# EAGLE board EBook READER v4 - Board (EAGLE 9.7.0)

Size 170.7 x 111.64 mm. Coordinates in mm from the lower left corner, seen from the top.
Outline: 0.48,111.53 0,0 170.43,0 170.7,111.64 0.48,111.53
Copper layers (1*16): Top / Bottom
Stack-up Default Layer Stack: Top User Defined 0.035mm / Dielectric-1 User Defined 1.5mm / Bottom User Defined 0.035mm
Design rules: minimum copper width 6mil, minimum drill size 0.35mm, copper clearance wire_polygon to wire_polygon 6mil, copper clearance wire_polygon to pad_smd 6mil, copper clearance wire_polygon to via 6mil, copper clearance pad_smd to pad_smd 6mil, copper clearance pad_smd to via 6mil, copper clearance via to via 6mil, copper clearance smd to pad (same net) 6mil, copper clearance smd to via (same net) 6mil, copper clearance smd to smd (same net) 6mil, dimension clearance 40mil, via restrict clearance 0mil, restrict clearance 0mil, drill distance 6mil, keepout clearance 0mil

## Footprints (pad centres in the part's own frame; a part is rotated, then mirrored left to right if it is on the bottom)
ESP32_WROVER_EAGLE-LTSPICE_C0402 = smd 0.7 x 0.9: 1 -0.65,0; 2 0.65,0
EAGLE-LTSPICE_C0402 = smd 0.7 x 0.9: 1 -0.65,0; 2 0.65,0
CAPCP3225X100N = smd 1.4 x 1.4: 1 -1.1,0; 2 1.1,0
RCL_CT3528 = smd 2 x 2.2: + -1.5,0; - 1.5,0
ADAFRUIT_CHIP-LED0603 = smd 0.8 x 0.8: A 0,-0.75; C 0,0.75
SOD3716X135N = smd 1.15 x 0.8: 1 -1.75,0; 2 1.75,0
DIOC1608X36N = smd 0.97 x 0.94: 1 -0.75,0; 2 0.75,0
ESP32_WROVER_AVX---SD0805S020S1R0_AVX_SD0805S020S1R0_0 = smd 0.8 x 0.9: 1 -1.05,0; 2 1.05,0
SOT95P280X145-6N = smd 1.2 x 0.6: 1 -1.25,0.95; 2 -1.25,0; 3 -1.25,-0.95; 4 1.25,-0.95; 5 1.25,0; 6 1.25,0.95
SOT95P280X120-5N = smd 0.9 x 0.6: 1 -1.4,0.95; 2 -1.4,0; 3 -1.4,-0.95; 4 1.4,-0.95; 5 1.4,0.95
SOT95P280X125-5N = smd 0.9 x 0.6: 1 -1.4,0.95; 2 -1.4,0; 3 -1.4,-0.95; 4 1.4,-0.95; 5 1.4,0.95
112ATAARR03ATTEND = smd 1.8 x 1.2: G1 10.6,10.4; G2 4.9,10.4; S1 7.75,10.4; S2 2.05,10.4 | smd 1.4 x 1.9: G3 13.6,-3.85; G4 0.45,-2.85 | smd 0.7 x 1.5: P1 8.8,0; P2 7.7,0.4; P3 6.6,0; P4 5.5,-0.2; P5 4.4,0; P6 3.3,-0.2; P7 2.2,0; P8 1.1,0
JST04_1MM_RA = smd 0.6 x 1.35: 1 -1.5,0; 2 -0.5,0; 3 0.5,0; 4 1.5,0 | smd 1.2 x 2: NC1 2.8,-3.675; NC2 -2.8,-3.675
FH34SRJ24S05SH99 = smd 0.3 x 0.8: 1 5.75,1.45; 2 5.25,1.45; 3 4.75,1.45; 4 4.25,1.45; 5 3.75,1.45; 6 3.25,1.45; 7 2.75,1.45; 8 2.25,1.45; 9 1.75,1.45; 10 1.25,1.45; 11 0.75,1.45; 12 0.25,1.45; 13 -0.25,1.45; 14 -0.75,1.45; 15 -1.25,1.45; 16 -1.75,1.45; 17 -2.25,1.45; 18 -2.75,1.45; 19 -3.25,1.45; 20 -3.75,1.45; 21 -4.25,1.45; 22 -4.75,1.45; 23 -5.25,1.45; 24 -5.75,1.45 | smd 0.4 x 0.8: MP1 6.75,-1.05; MP2 -6.75,-1.05
SAMACSYS_PARTS_USB4110GFA = smd 0.3 x 1.15: A1 -3.35,3.678; A4 -2.55,3.678; A5 -1.25,3.678; A6 -0.25,3.678; A7 0.25,3.678; A8 1.25,3.678; A9 2.55,3.678; A12 3.35,3.678; B1 3.05,3.678; B4 2.25,3.678; B5 1.75,3.678; B6 0.75,3.678; B7 -0.75,3.678; B8 -1.75,3.678; B9 -2.25,3.678; B12 -3.05,3.678 | smd 2.18 x 2: MP1 -5.11,-0.827; MP2 5.11,-0.827; MP3 -5.11,3.103; MP4 5.11,3.103 | hole 0.65: -2.89,2.603; 2.89,2.603
IND_4828-WE-TPC_WRE = smd 0.127 x 0.127: 1 -2.286,0; 2 2.286,0
ESP32_WROVER_SPARKFUN-IC-POWER_SOT23-5 = smd 0.55 x 1.2: 1 -0.95,-1.3; 2 0,-1.3; 3 0.95,-1.3; 4 0.95,1.3; 5 -0.95,1.3
ESP32_WROVER_SPARKFUN-DISCRETESEMI_SOT23-3 = smd 0.8 x 0.9: 1 -0.95,-1; 2 0.95,-1; 3 0,1.1
SOT65P210X110-3N = smd 1.05 x 0.5: 1 -1.05,0.65; 2 -1.05,-0.65; 3 1.05,0
ESP32_WROVER_EAGLE-LTSPICE_R0402 = smd 0.7 x 0.9: 1 -0.65,0; 2 0.65,0
RESC1005X40 = smd 0.535 x 0.644: 1 -0.507,0; 2 0.507,0
ESP32C6_VARISTOR_CT/CN1812 = smd 1.5 x 3.6: 1 -2.25,0; 2 2.25,0
SJ = smd 1.168 x 1.6: 1 -0.762,0; 2 0.762,0
TP20R = smd 2 x 2: TP 0,0
SON50P200X200X80-9N = smd 0.76 x 0.27: 1 -0.985,0.75; 2 -0.985,0.25; 3 -0.985,-0.25; 4 -0.985,-0.75; 5 0.985,-0.75; 6 0.985,-0.25; 7 0.985,0.25; 8 0.985,0.75 | smd 0.9 x 1.3: 9 0,0
SON127P600X800X80-9N = smd 0.94 x 0.44: 1 -3.895,1.905; 2 -3.895,0.635; 3 -3.895,-0.635; 4 -3.895,-1.905; 5 3.895,-1.905; 6 3.895,-0.635; 7 3.895,0.635; 8 3.895,1.905 | smd 3.4 x 4.3: 9 0,0
XCVR_ESP32-C6-WROOM-1-N8 = smd 1.5 x 0.9: 1 -8.75,5.26; 2 -8.75,3.99; 3 -8.75,2.72; 4 -8.75,1.45; 5 -8.75,0.18; 6 -8.75,-1.09; 7 -8.75,-2.36; 8 -8.75,-3.63; 9 -8.75,-4.9; 10 -8.75,-6.17; 11 -8.75,-7.44; 12 -8.75,-8.71; 13 -8.75,-9.98; 14 -8.75,-11.25; 15 8.75,-11.25; 16 8.75,-9.98; 17 8.75,-8.71; 18 8.75,-7.44; 19 8.75,-6.17; 20 8.75,-4.9; 21 8.75,-3.63; 22 8.75,-2.36; 23 8.75,-1.09; 24 8.75,0.18; 25 8.75,1.45; 26 8.75,2.72; 27 8.75,3.99; 28 8.75,5.26 | smd 0.8 x 0.8: 29_1 -2.755,0.79; 29_2 -1.505,0.79; 29_3 -0.255,0.79; 29_4 -2.755,-0.46; 29_5 -1.505,-0.46; 29_6 -0.255,-0.46; 29_7 -2.755,-1.71; 29_8 -1.505,-1.71; 29_9 -0.255,-1.71
ESP32_WROVER_BME680_PSON80P300X300X100-8N = smd 1.016 x 0.5: 1 1.458,1.2; 2 1.458,0.4; 3 1.458,-0.4; 4 1.458,-1.2; 5 -1.458,-1.22; 6 -1.458,-0.4; 7 -1.458,0.4; 8 -1.458,1.2
SOIC127P1032X265-16N = smd 2.05 x 0.59: 1 -4.655,4.445; 2 -4.655,3.175; 3 -4.655,1.905; 4 -4.655,0.635; 5 -4.655,-0.635; 6 -4.655,-1.905; 7 -4.655,-3.175; 8 -4.655,-4.445; 9 4.655,-4.445; 10 4.655,-3.175; 11 4.655,-1.905; 12 4.655,-0.635; 13 4.655,0.635; 14 4.655,1.905; 15 4.655,3.175; 16 4.655,4.445
MYBUTTON = smd 1.4 x 1.05: 1 1.75,0.75; 2 -1.75,0.75; 3 -1.75,-0.75; 4 1.75,-0.75

## Placement (x,y rotation side)
C1  [ESP32_WROVER_EAGLE-LTSPICE_C0402]  -60.69,96.52 0 top  (outside the outline)
C1_BAT  4.7uF  [ESP32_WROVER_EAGLE-LTSPICE_C0402]  -88.63,71.12 0 top  (outside the outline)
C1_BAT1  4.7uF  [ESP32_WROVER_EAGLE-LTSPICE_C0402]  -67.04,66.04 0 top  (outside the outline)
C1_BAT2  4.7uF  [ESP32_WROVER_EAGLE-LTSPICE_C0402]  -77.2,66.04 0 top  (outside the outline)
C2  [ESP32_WROVER_EAGLE-LTSPICE_C0402]  -64.5,96.52 0 top  (outside the outline)
C2_BAT  4.7uF  [ESP32_WROVER_EAGLE-LTSPICE_C0402]  -97.52,71.12 0 top  (outside the outline)
C3  [EAGLE-LTSPICE_C0402]  -68.31,96.52 0 top  (outside the outline)
C4  4.7uF/25V  [EAGLE-LTSPICE_C0402]  -46.72,66.04 0 top  (outside the outline)
C5  CPH3225A  [CAPCP3225X100N]  -22.59,66.04 0 top  (outside the outline)
C6  1uF/50V  [ESP32_WROVER_EAGLE-LTSPICE_C0402]  -86.09,66.04 0 top  (outside the outline)
C7  10uF  [EAGLE-LTSPICE_C0402]  -93.71,76.2 0 top  (outside the outline)
C8  1uF/50V  [ESP32_WROVER_EAGLE-LTSPICE_C0402]  -94.98,66.04 0 top  (outside the outline)
C9  100nF  [EAGLE-LTSPICE_C0402]  -50.53,76.2 0 top  (outside the outline)
C10  0.1uF/50V  [ESP32_WROVER_EAGLE-LTSPICE_C0402]  -56.88,66.04 0 top  (outside the outline)
C11  1uF/50V  [ESP32_WROVER_EAGLE-LTSPICE_C0402]  -26.4,71.12 0 top  (outside the outline)
C12  1uF/50V  [ESP32_WROVER_EAGLE-LTSPICE_C0402]  -35.29,71.12 0 top  (outside the outline)
C13  1uF/50V  [ESP32_WROVER_EAGLE-LTSPICE_C0402]  -44.18,71.12 0 top  (outside the outline)
C14  1uF/50V  [ESP32_WROVER_EAGLE-LTSPICE_C0402]  -53.07,71.12 0 top  (outside the outline)
C15  1uF/50V  [ESP32_WROVER_EAGLE-LTSPICE_C0402]  -61.96,71.12 0 top  (outside the outline)
C16  1uF/50V  [ESP32_WROVER_EAGLE-LTSPICE_C0402]  -70.85,71.12 0 top  (outside the outline)
C17  1uF/50V  [ESP32_WROVER_EAGLE-LTSPICE_C0402]  -79.74,71.12 0 top  (outside the outline)
C18  100uF  [RCL_CT3528]  -47.99,50.8 0 top  (outside the outline)
C19  100nF  [ESP32_WROVER_EAGLE-LTSPICE_C0402]  -58.15,76.2 0 top  (outside the outline)
C20  4.7uF  [ESP32_WROVER_EAGLE-LTSPICE_C0402]  -87.36,76.2 0 top  (outside the outline)
C21  100nF  [ESP32_WROVER_EAGLE-LTSPICE_C0402]  -65.77,76.2 0 top  (outside the outline)
C22  1uF  [ESP32_WROVER_EAGLE-LTSPICE_C0402]  -22.59,81.28 0 top  (outside the outline)
C23  100nF  [ESP32_WROVER_EAGLE-LTSPICE_C0402]  -73.39,76.2 0 top  (outside the outline)
C24  100nF  [ESP32_WROVER_EAGLE-LTSPICE_C0402]  -81.01,76.2 0 top  (outside the outline)
CHG_LED  [ADAFRUIT_CHIP-LED0603]  -79.74,31.75 0 top  (outside the outline)
D1  MBR0530  [SOD3716X135N]  -86.09,96.52 0 top  (outside the outline)
D2  MBR0530  [SOD3716X135N]  -23.86,101.6 0 top  (outside the outline)
D3  MBR0530  [SOD3716X135N]  -34.02,101.6 0 top  (outside the outline)
D4  PGB1010603MR  [DIOC1608X36N]  -79.74,91.44 0 top  (outside the outline)
D5  PGB1010603MR  [DIOC1608X36N]  -87.36,91.44 0 top  (outside the outline)
D6  PGB1010603MR  [DIOC1608X36N]  -94.98,91.44 0 top  (outside the outline)
D7  PGB1010603MR  [DIOC1608X36N]  -25.13,96.52 0 top  (outside the outline)
D8  PGB1010603MR  [DIOC1608X36N]  -32.75,96.52 0 top  (outside the outline)
D9  PGB1010603MR  [DIOC1608X36N]  -40.37,96.52 0 top  (outside the outline)
D10  ESP32_WROVER_AVX---SD0805S020S1R0_AVX_SD0805S020S1R0_0_0AVX_SD0805S020S1R0_0_0  [ESP32_WROVER_AVX---SD0805S020S1R0_AVX_SD0805S020S1R0_0]  -61.96,100.33 0 top  (outside the outline)
D11  ESP32_WROVER_AVX---SD0805S020S1R0_AVX_SD0805S020S1R0_0_0AVX_SD0805S020S1R0_0_0  [ESP32_WROVER_AVX---SD0805S020S1R0_AVX_SD0805S020S1R0_0]  -68.31,100.33 0 top  (outside the outline)
D12  USBLC6-2SC6Y  [SOT95P280X145-6N]  -67.04,91.44 0 top  (outside the outline)
IC1  XC6220A331MR-G  [SOT95P280X120-5N]  -37.83,91.44 0 top  (outside the outline)
IC2  BD5229G-TR  [SOT95P280X125-5N]  -53.07,91.44 0 top  (outside the outline)
J1  112A-TAAR-R03_ATTEND  [112ATAARR03ATTEND]  -92.44,6.35 0 top  (outside the outline)
J2  QWIIC_RIGHT_ANGLE  [JST04_1MM_RA]  -70.85,60.96 0 top  (outside the outline)
J3  FH34SRJ-24S-0.5SH_99_  [FH34SRJ24S05SH99]  -86.09,58.42 0 top  (outside the outline)
J4  SAMACSYS_PARTS_USB4110-GF-A  [SAMACSYS_PARTS_USB4110GFA]  -47.99,35.56 0 top  (outside the outline)
L1  68uH  [IND_4828-WE-TPC_WRE]  -55.61,19.05 0 top  (outside the outline)
MCP73831  ESP32_WROVER_SPARKFUN-IC-POWER_MCP73831  [ESP32_WROVER_SPARKFUN-IC-POWER_SOT23-5]  -40.37,59.69 0 top  (outside the outline)
Q1  20V/4.2A/52mΩ/1.4W  [ESP32_WROVER_SPARKFUN-DISCRETESEMI_SOT23-3]  -84.82,35.56 0 top  (outside the outline)
Q2  SI1308EDL-T1-GE3  [SOT65P210X110-3N]  -47.99,101.6 0 top  (outside the outline)
Q3  20V/4.2A/52mΩ/1.4W  [ESP32_WROVER_SPARKFUN-DISCRETESEMI_SOT23-3]  -89.9,35.56 0 top  (outside the outline)
R1  [ESP32_WROVER_EAGLE-LTSPICE_R0402]  -72.12,96.52 0 top  (outside the outline)
R1_BAT  200  [ESP32_WROVER_EAGLE-LTSPICE_R0402]  -26.4,76.2 0 top  (outside the outline)
R1_PWRUSB  100K  [ESP32_WROVER_EAGLE-LTSPICE_R0402]  -36.56,66.04 0 top  (outside the outline)
R2  2.2  [RESC1005X40]  -61.96,58.42 0 top  (outside the outline)
R2_BAT  2K  [ESP32_WROVER_EAGLE-LTSPICE_R0402]  -35.29,76.2 0 top  (outside the outline)
R3  [ESP32_WROVER_EAGLE-LTSPICE_R0402]  -75.93,96.52 0 top  (outside the outline)
R4  [ESP32_WROVER_EAGLE-LTSPICE_R0402]  -79.74,96.52 0 top  (outside the outline)
R5  10K  [ESP32_WROVER_EAGLE-LTSPICE_R0402]  -63.23,81.28 0 top  (outside the outline)
R6  0.47  [ESP32_WROVER_EAGLE-LTSPICE_R0402]  -98.79,76.2 0 top  (outside the outline)
R7  10K  [ESP32_WROVER_EAGLE-LTSPICE_R0402]  -68.31,81.28 0 top  (outside the outline)
R8  10K  [ESP32_WROVER_EAGLE-LTSPICE_R0402]  -73.39,81.28 0 top  (outside the outline)
R9  10K  [ESP32_WROVER_EAGLE-LTSPICE_R0402]  -78.47,81.28 0 top  (outside the outline)
R10  10K  [ESP32_WROVER_EAGLE-LTSPICE_R0402]  -27.67,81.28 0 top  (outside the outline)
R11  10K  [ESP32_WROVER_EAGLE-LTSPICE_R0402]  -83.55,81.28 0 top  (outside the outline)
R12  10K  [ESP32_WROVER_EAGLE-LTSPICE_R0402]  -32.75,81.28 0 top  (outside the outline)
R13  [ESP32_WROVER_EAGLE-LTSPICE_R0402]  -46.72,96.52 0 top  (outside the outline)
R14  [ESP32_WROVER_EAGLE-LTSPICE_R0402]  -51.8,96.52 0 top  (outside the outline)
R15  [ESP32_WROVER_EAGLE-LTSPICE_R0402]  -56.88,96.52 0 top  (outside the outline)
R16  5k1  [ESP32_WROVER_EAGLE-LTSPICE_R0402]  -37.83,81.28 0 top  (outside the outline)
R17  5k1  [ESP32_WROVER_EAGLE-LTSPICE_R0402]  -42.91,81.28 0 top  (outside the outline)
R18  ESP32C6_VARISTORCN1812  [ESP32C6_VARISTOR_CT/CN1812]  -41.64,50.8 0 top  (outside the outline)
R19  10K  [ESP32_WROVER_EAGLE-LTSPICE_R0402]  -47.99,81.28 0 top  (outside the outline)
R20  10K  [ESP32_WROVER_EAGLE-LTSPICE_R0402]  -53.07,81.28 0 top  (outside the outline)
R21  10K  [ESP32_WROVER_EAGLE-LTSPICE_R0402]  -58.15,81.28 0 top  (outside the outline)
R_CL1  10K  [ESP32_WROVER_EAGLE-LTSPICE_R0402]  -42.91,76.2 0 top  (outside the outline)
SJ1  [SJ]  -26.4,91.44 0 top  (outside the outline)
TP1  TPTP20R  [TP20R]  -59.42,86.36 0 top  (outside the outline)
TP2  TPTP20R  [TP20R]  -64.5,86.36 0 top  (outside the outline)
TP3  TPTP20R  [TP20R]  -69.58,86.36 0 top  (outside the outline)
TP4  TPTP20R  [TP20R]  -74.66,86.36 0 top  (outside the outline)
TP5  TPTP20R  [TP20R]  -79.74,86.36 0 top  (outside the outline)
TP6  TPTP20R  [TP20R]  -84.82,86.36 0 top  (outside the outline)
TP7  TPTP20R  [TP20R]  -89.9,86.36 0 top  (outside the outline)
TP8  TPTP20R  [TP20R]  -94.98,86.36 0 top  (outside the outline)
TP9  TPTP20R  [TP20R]  -22.59,91.44 0 top  (outside the outline)
TP10  TPTP20R  [TP20R]  -89.9,81.28 0 top  (outside the outline)
TP11  TPTP20R  [TP20R]  -54.34,86.36 0 top  (outside the outline)
TP12  TPTP20R  [TP20R]  -96.25,81.28 0 top  (outside the outline)
TP13  TPTP20R  [TP20R]  -22.59,86.36 0 top  (outside the outline)
TP14  TPTP20R  [TP20R]  -28.94,86.36 0 top  (outside the outline)
TP15  TPTP20R  [TP20R]  -35.29,86.36 0 top  (outside the outline)
TP16  TPTP20R  [TP20R]  -41.64,86.36 0 top  (outside the outline)
TP17  TPTP20R  [TP20R]  -47.99,86.36 0 top  (outside the outline)
U1  MAX17048G+T10  [SON50P200X200X80-9N]  -56.88,58.42 0 top  (outside the outline)
U2  W25Q512JVEIQ  [SON127P600X800X80-9N]  -73.39,35.56 0 top  (outside the outline)
U3  ESP32-C6-WROOM-1-N8  [XCVR_ESP32-C6-WROOM-1-N8]  -31.48,15.24 0 top  (outside the outline)
U4  ESP32_WROVER_BME680_BME680  [ESP32_WROVER_BME680_PSON80P300X300X100-8N]  -88.63,49.53 0 top  (outside the outline)
U5  DS3231SN#  [SOIC127P1032X265-16N]  -25.13,38.1 0 top  (outside the outline)
U$1  BUTTON_CUSYOMV1  [MYBUTTON]  -54.34,48.26 0 top  (outside the outline)
U$2  BUTTON_CUSYOMV1  [MYBUTTON]  -60.69,48.26 0 top  (outside the outline)
U$3  BUTTON_CUSYOMV1  [MYBUTTON]  -67.04,48.26 0 top  (outside the outline)

## Library data of the parts
C1 C1_BAT C1_BAT1 C1_BAT2 C2 C2_BAT C3 C4 C6-C17 C19-C24 = DeskAssistant v19 v1; SPICEMODEL: NONE; SPICEPREFIX: C
C5 = DeskAssistant v19 v1; AVAILABILITY: Not in stock; CHECK_PRICES: https://www.snapeda.com/parts/CPH3225A/Seiko+Instruments/view-part/?ref=eda; DESCRIPTION: 11 mF (EDLC) Supercapacitor 3.3 V 1210 (3225 Metric) - -; MF: Seiko Instruments; MP: CPH3225A; PACKAGE: 1210 Seiko; PRICE: None; PURCHASE-URL: https://www.snapeda.com/api/url_track_click_mouser/?unipart_id=562593&manufacturer=Seiko Instruments&part_name=CPH3225A&search_term=None; SNAPEDA_LINK: https://www.snapeda.com/parts/CPH3225A/Seiko+Instruments/view-part/?ref=snap
C18 = DeskAssistant v19 v1; SPICEPREFIX: C
CHG_LED R18 TP1-TP17 U$1-U$3 = DeskAssistant v19 v1
D1-D3 = DeskAssistant v19 v1; AVAILABILITY: In Stock; CHECK_PRICES: https://www.snapeda.com/parts/MBR0530/Onsemi/view-part/?ref=eda; DESCRIPTION: Diode Schottky 30 V 500mA Surface Mount SOD-123; MF: ON Semiconductor; MP: MBR0530; PACKAGE: SOD-123-2 ON Semiconductor; PRICE: None; PURCHASE-URL: https://www.snapeda.com/api/url_track_click_mouser/?unipart_id=179458&manufacturer=ON Semiconductor&part_name=MBR0530&search_term=None; SNAPEDA_LINK: https://www.snapeda.com/parts/MBR0530/Onsemi/view-part/?ref=snap
D4-D9 = DeskAssistant v19 v1; AVAILABILITY: In Stock; CHECK_PRICES: https://www.snapeda.com/parts/PGB1010603MR/Littelfuse/view-part/?ref=eda; DESCRIPTION: 150V (Typ) Clamp - Ipp Tvs Diode Surface Mount 0603 (1608 Metric); MF: Littelfuse Inc.; MP: PGB1010603MR; PACKAGE: 0603 Littelfuse Inc.; PRICE: None; PURCHASE-URL: https://www.snapeda.com/api/url_track_click_mouser/?unipart_id=5659453&manufacturer=Littelfuse Inc.&part_name=PGB1010603MR&search_term=None; SNAPEDA_LINK: https://www.snapeda.com/parts/PGB1010603MR/Littelfuse/view-part/?ref=snap
D10 D11 = DeskAssistant v19 v1; CENTROID_NOT_SPECIFIED: No; DATASHEET: http://datasheets.avx.com/schottky.pdf; DIGIKEY_DESCRIPTION: DIODE SCHOTTKY 20V 1A 0805; DIGIKEY_PART_NUMBER: 478-7800-1-ND; LEAD_FREE: yes; MF: AVX; MOUSER_PART_NUMBER: 581-SD0805S020S1R0; PACKAGE: 0805 (2012 metric); PREFIX: D; ROHS: yes; TEMPERATURE_RANGE_HIGH: +125°C; TEMPERATURE_RANGE_LOW: -55°C
D12 = DeskAssistant v19 v1; AVAILABILITY: In Stock; CHECK_PRICES: https://www.snapeda.com/parts/USBLC6-2SC6Y/STMicroelectronics/view-part/?ref=eda; DESCRIPTION: 17V Clamp 5A (8/20µs) Ipp Tvs Diode Surface Mount SOT-23-6; MF: STMicroelectronics; MP: USBLC6-2SC6Y; PACKAGE: SOT-23-6 STMicroelectronics; PRICE: None; SNAPEDA_LINK: https://www.snapeda.com/parts/USBLC6-2SC6Y/STMicroelectronics/view-part/?ref=snap
IC1 = DeskAssistant v19 v1; DESCRIPTION: LDO Voltage Regulators; HEIGHT: 1.2mm; MANUFACTURER_NAME: Torex; MANUFACTURER_PART_NUMBER: XC6220A331MR-G; MOUSER_PART_NUMBER: 865-XC6220A331MR-G; MOUSER_PRICE-STOCK: https://www.mouser.co.uk/ProductDetail/Torex-Semiconductor/XC6220A331MR-G?qs=AsjdqWjXhJ8ZSWznL1J0gg%3D%3D
IC2 = DeskAssistant v19 v1; DESCRIPTION: Voltage Detector with Adjustable Delay Time: CMOS processes are utilized to develop high precision, low current consumption CMOS reset ICs that allow arbitrary setting of the delay time. The extensive lineup includes both Nch Open Drain and CMOS output types in a wide range of detection voltages (from 2.3V to 6.0V, in 0.1V steps), enabling selection of the ideal solution based on customer requirements. In addition, the entire series is of course both lead-free and RoHS-compliant.; HEIGHT: 1.25mm; MANUFACTURER_NAME: ROHM Semiconductor; MANUFACTURER_PART_NUMBER: BD5229G-TR; MOUSER_PART_NUMBER: 755-BD5229G-TR; MOUSER_PRICE-STOCK: https://www.mouser.co.uk/ProductDetail/ROHM-Semiconductor/BD5229G-TR?qs=4kLU8WoGk0vvnhrrYwdszw%3D%3D
J1 = DeskAssistant v19 v1; DESCRIPTION: Micro SD Card Socket, Push-Push Type, Top Mount, SMT, H=1.83mm, 10u; HEIGHT: 1.9mm; MANUFACTURER_NAME: ATTEND; MANUFACTURER_PART_NUMBER: 112A-TAAR-R03 ATTEND
J2 = DeskAssistant v19 v1; PROD_ID: CONN-13694
J3 = DeskAssistant v19 v1; DESCRIPTION: 24 Position FFC, FPC Connector Contacts, Top and Bottom 0.020" (0.50mm) Surface Mount, Right Angle; HEIGHT: 1.1mm; MANUFACTURER_NAME: Hirose; MANUFACTURER_PART_NUMBER: FH34SRJ-24S-0.5SH(99); MOUSER_PART_NUMBER: 798-FH34SRJ24S05SH99; MOUSER_PRICE-STOCK: https://www.mouser.co.uk/ProductDetail/Hirose-Connector/FH34SRJ-24S-0.5SH99?qs=vcbW%252B4%252BSTIpKBl5ap9J8Fw%3D%3D
J4 = DeskAssistant v19 v1; DESCRIPTION: CONN USB 2.0 TYPE-C R/A SMT; HEIGHT: 3.26mm; MANUFACTURER_NAME: GCT (GLOBAL CONNECTOR TECHNOLOGY); MANUFACTURER_PART_NUMBER: USB4110-GF-A; MOUSER_PART_NUMBER: 640-USB4110-GF-A; MOUSER_PRICE-STOCK: https://www.mouser.co.uk/ProductDetail/GCT/USB4110-GF-A?qs=KUoIvG%2F9IlYiZvIXQjyJeA%3D%3D
L1 = DeskAssistant v19 v1; COPYRIGHT: Copyright (C) 2024 Ultra Librarian. All rights reserved.; MANUFACTURER_PART_NUMBER: 744043680; MFR_NAME: Wurth Electronics
MCP73831 = DeskAssistant v19 v1; PROD_ID: IC-09995
Q1 Q3 = DeskAssistant v19 v1; PROD_ID: TRAN-14388
Q2 = DeskAssistant v19 v1; AVAILABILITY: In Stock; CHECK_PRICES: https://www.snapeda.com/parts/SI1308EDL-T1-GE3/Vishay+Siliconix/view-part/?ref=eda; DESCRIPTION: Si1308EDL-T1-GE3 N-channel MOSFET Transistor, 1.5 A, 30 V, 3-Pin SC-70 | Siliconix / Vishay SI1308EDL-T1-GE3; MF: Vishay Siliconix; MP: SI1308EDL-T1-GE3; PACKAGE: SOT-323 Vishay Semiconductor; PRICE: None; PURCHASE-URL: https://www.snapeda.com/api/url_track_click_mouser/?unipart_id=274603&manufacturer=Vishay Siliconix&part_name=SI1308EDL-T1-GE3&search_term=None; SNAPEDA_LINK: https://www.snapeda.com/parts/SI1308EDL-T1-GE3/Vishay+Siliconix/view-part/?ref=snap
R1 R1_BAT R1_PWRUSB R2_BAT R3-R17 R19-R21 R_CL1 = DeskAssistant v19 v1; SPICEMODEL: NONE; SPICEPREFIX: R
R2 = Resistor; CATEGORY: Resistors; DESCRIPTION: Chip Resistor 1.05 X 0.54 X 0.40 mm body 0402(1005-METRIC) Package; PACKAGE_SIZE: 0402; PACKAGE_TYPE: SMD
SJ1 = jumper
U1 = DeskAssistant v19 v1; AVAILABILITY: In Stock; CHECK_PRICES: https://www.snapeda.com/parts/MAX17048G+T10/Analog+Devices/view-part/?ref=eda; DESCRIPTION: 3µA 1-Cell/2-Cell Fuel Gauge with ModelGauge; MF: Analog Devices; MP: MAX17048G+T10; PACKAGE: TDFN-8 Maxim; PRICE: None; PURCHASE-URL: https://www.snapeda.com/api/url_track_click_mouser/?unipart_id=329239&manufacturer=Analog Devices&part_name=MAX17048G+T10&search_term=None; SNAPEDA_LINK: https://www.snapeda.com/parts/MAX17048G+T10/Analog+Devices/view-part/?ref=snap
U2 = DeskAssistant v19 v1; AVAILABILITY: In Stock; CHECK_PRICES: https://www.snapeda.com/parts/W25Q512JVEIQ/Winbond+Electronics/view-part/?ref=eda; DESCRIPTION: FLASH - NOR Memory IC 512Mb (64M x 8) SPI - Quad I/O 133 MHz 8-WSON (8x6); MF: Winbond Electronics; MP: W25Q512JVEIQ; PACKAGE: Package; PRICE: None; SNAPEDA_LINK: https://www.snapeda.com/parts/W25Q512JVEIQ/Winbond+Electronics/view-part/?ref=snap
U3 = DeskAssistant v19 v1; AVAILABILITY: In Stock; CHECK_PRICES: https://www.snapeda.com/parts/ESP32-C6-WROOM-1-N8/Espressif+Systems/view-part/?ref=eda; DESCRIPTION: Multiprotocol Modules ESP32-C6 module, Wi-Fi 6 in 2.4 GHz band, Bluetooth 5, Zigbee 3.0 and Thread. ESP34-WROOM Compatible - ENGINEERING SAMPLE; MF: Espressif Systems; MP: ESP32-C6-WROOM-1-N8; PACKAGE: None; PRICE: None; SNAPEDA_LINK: https://www.snapeda.com/parts/ESP32-C6-WROOM-1-N8/Espressif+Systems/view-part/?ref=snap
U4 = DeskAssistant v19 v1; AVAILABILITY: Unavailable; DESCRIPTION: Integrated Environmental Unit; MF: Bosch Sensortec; MP: BME680; PACKAGE: LGA-8 Bosch Tools; PRICE: None
U5 = DeskAssistant v19 v1; AVAILABILITY: In Stock; CHECK_PRICES: https://www.snapeda.com/parts/DS3231SN%23/Analog+Devices/view-part/?ref=eda; DESCRIPTION: Extremely Accurate I²C-Integrated RTC/TCXO/Crystal; MF: Analog Devices; MP: DS3231SN#; PACKAGE: SOIC-16 Maxim; PRICE: None; PURCHASE-URL: https://www.snapeda.com/api/url_track_click_mouser/?unipart_id=99048&manufacturer=Analog Devices&part_name=DS3231SN#&search_term=None; SNAPEDA_LINK: https://www.snapeda.com/parts/DS3231SN%23/Analog+Devices/view-part/?ref=snap

## Nets
3V3: C1_BAT2.1 C9.1 C18.+ D10.2 IC1.5 IC2.2 J1.P4 J2.2 Q1.3 R1.2 R7.2 R8.2 R9.2 R10.2 R11.2 R12.2 R14.2 R15.2 R19.2 R20.2 R21.2 R_CL1.2 TP16.TP U2.3 U2.7 U2.8 U3.2 U5.2
12C_PW: C1.1 C2.1 R3.2 R4.2 U3.17 U4.2 U4.6 U4.8
32KHZ: R14.1 U3.9 U5.1
DN: D12.1 J4.A7 J4.B7
DP: D12.3 J4.A6 J4.B6
EPD_3V3: C7.1 C10.1 J3.15 J3.16 L1.2 Q1.2 TP17.TP
EPD_3V3_C: Q1.1 R_CL1.1 TP13.TP U3.18
EPD_BUSY: J3.9 TP9.TP U3.26
EPD_CS: D8.2 J3.12 R8.1 TP10.TP U3.11
EPD_DC: J3.11 TP11.TP U3.5
EPD_RST: J3.10 TP12.TP U3.21
FLASH_CS: D7.2 R9.1 U2.1 U3.12
GDR: J3.2 Q2.1 R5.2
GND: C1.2 C1_BAT1.2 C1_BAT2.2 C1_BAT.2 C2.2 C2_BAT.2 C3.2 C5.2 C6.2 C7.2 C8.2 C9.2 C10.2 C11.2 C12.2 C13.2 C14.2 C15.2 C16.2 C17.2 C18.- C19.2 C20.2 C21.2 C22.2 C23.2 C24.2 D3.1 D4.1 D5.1 D6.1 D7.1 D8.1 D9.1 D12.5 IC1.2 IC2.3 J1.G1 J1.G2 J1.G3 J1.G4 J1.P6 J2.1 J3.8 J3.17 J3.MP1 J3.MP2 J4.A1 J4.A12 J4.B1 J4.B12 J4.MP1 J4.MP2 J4.MP3 J4.MP4 MCP73831.2 R1_PWRUSB.1 R2.1 R2_BAT.1 R5.1 R16.1 R17.2 SJ1.1 TP4.TP TP5.TP U1.1 U1.4 U1.6 U1.9 U2.4 U2.9 U3.1 U3.28 U3.29_1 U3.29_2 U3.29_3 U3.29_4 U3.29_5 U3.29_6 U3.29_7 U3.29_8 U3.29_9 U4.1 U4.5 U4.7 U5.13 U$1.1 U$1.2 U$2.1 U$2.2 U$3.1 U$3.2
GPIO8: R1.1 U3.10
INT_RTC: R15.1 TP15.TP U3.8 U5.3
IO/BOOT: C23.1 R19.1 U3.15 U$2.3 U$2.4
IO/CHANGE: C24.1 R21.1 U3.23 U$3.3 U$3.4
MISO: D4.2 J1.P7 R12.1 TP6.TP U2.2 U3.27
MOSI: D5.2 J1.P3 J3.14 R11.1 TP7.TP U2.5 U3.7
N$1: C4.1 D2.1 D3.2
N$2: MCP73831.1 R1_BAT.2
N$3: CHG_LED.C R1_BAT.1
N$4: C1_BAT1.1 D11.1 IC1.1 IC1.3 Q3.2
N$5: MCP73831.5 R2_BAT.2
N$6: C17.1 J3.24
N$7: C21.1 IC2.5
N$8: C15.1 J3.22
N$10: C13.1 J3.20
N$11: D10.1 R13.1
N$12: C12.1 J3.19
N$13: C11.1 J3.18
N$20: C6.1 J3.5
N$21: C8.1 J3.4
N$26: J4.A5 R16.2
N$27: C19.1 C20.1
N$28: J4.B5 R17.1
PREVGH: C14.1 D1.1 J3.21
PREVGL: C16.1 D2.2 J3.23
RESE: J3.3 Q2.2 R6.2
RESE': R6.1
RESET: C22.1 IC2.1 R2.2 R20.1 SJ1.2 U3.3 U$1.3 U$1.4
RTC_RST: U3.16 U5.4
RX: TP2.TP U3.24
SCK: D6.2 J1.P5 J3.13 R10.1 TP8.TP U2.6 U3.6
SCL: J2.4 R3.1 U1.7 U3.20 U4.4 U5.16
SDA: J2.3 R4.1 U1.8 U3.19 U4.3 U5.15
SRC: C4.2 D1.2 L1.1 Q2.3
SS_SD: D9.2 J1.P2 R7.1 U3.4
TX: TP1.TP U3.25
USB_D+: D12.4 U3.14
USB_D-: D12.6 U3.13
VBAT: C2_BAT.1 MCP73831.3 Q3.3 TP3.TP U1.2 U1.3
VBUS: C1_BAT.1 CHG_LED.A D11.2 D12.2 MCP73831.4 Q3.1 R1_PWRUSB.2 R18.2 TP14.TP
VRTC: C3.1 C5.1 R13.2 U5.14
VUSB: J4.A4 J4.A9 J4.B4 J4.B9 R18.1

## Tracks (layer width: path | path; a pad name or v marks a point on that pad's centre or on a via)
3V3  (27 unrouted)
12C_PW  (7 unrouted)
32KHZ  (2 unrouted)
DN  (2 unrouted)
DP  (2 unrouted)
EPD_3V3  (6 unrouted)
EPD_3V3_C  (3 unrouted)
EPD_BUSY  (2 unrouted)
EPD_CS  (4 unrouted)
EPD_DC  (2 unrouted)
EPD_RST  (2 unrouted)
FLASH_CS  (3 unrouted)
GDR  (2 unrouted)
GND  (91 unrouted)
GPIO8  (1 unrouted)
INT_RTC  (3 unrouted)
IO/BOOT  (4 unrouted)
IO/CHANGE  (4 unrouted)
MISO  (5 unrouted)
MOSI  (6 unrouted)
N$1  (2 unrouted)
N$2  (1 unrouted)
N$3  (1 unrouted)
N$4  (4 unrouted)
N$5  (1 unrouted)
N$6  (1 unrouted)
N$7  (1 unrouted)
N$8  (1 unrouted)
N$10  (1 unrouted)
N$11  (1 unrouted)
N$12  (1 unrouted)
N$13  (1 unrouted)
N$20  (1 unrouted)
N$21  (1 unrouted)
N$26  (1 unrouted)
N$27  (1 unrouted)
N$28  (1 unrouted)
PREVGH  (2 unrouted)
PREVGL  (2 unrouted)
RESE  (2 unrouted)
RESET  (7 unrouted)
RTC_RST  (1 unrouted)
RX  (1 unrouted)
SCK  (6 unrouted)
SCL  (5 unrouted)
SDA  (5 unrouted)
SRC  (3 unrouted)
SS_SD  (3 unrouted)
TX  (1 unrouted)
USB_D+  (1 unrouted)
USB_D-  (1 unrouted)
VBAT  (5 unrouted)
VBUS  (8 unrouted)
VRTC  (3 unrouted)
VUSB  (4 unrouted)